# EAGLE board power mux-fpf1320 (EAGLE 6.5.0)
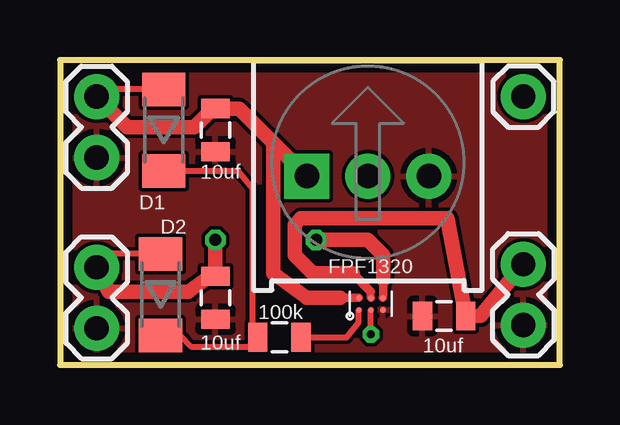
[diagram p0: board, top side]
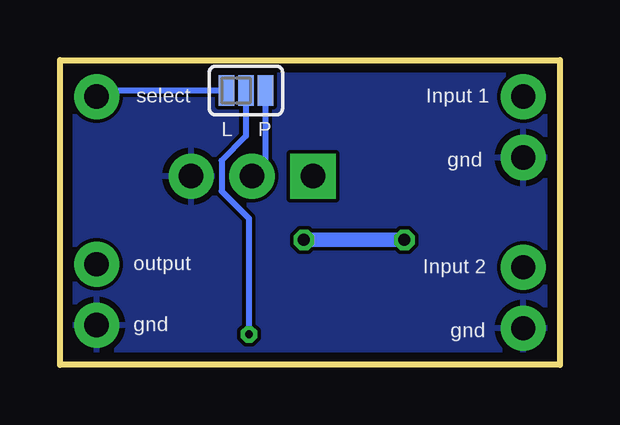
[diagram p1: board, bottom side, seen from below]

Size 20.83 x 12.7 mm. Coordinates in mm from the lower left corner, seen from the top.
Outline: 0,0 20.83,0 20.83,12.7 0,12.7 0,0
Copper layers (1*16): Top 0.0356mm / dielectric 1.5011mm / Bottom 0.0356mm
Design rules "LaenPCBOrder": minimum track width 6mil, minimum drill 13mil, track to track 6mil, track to pad 6mil, pad to pad 6mil, via to via 6mil, smd to smd 6mil, copper to edge 15mil, drill to drill 6mil, minimum pad ring 7mil, minimum via ring 7mil, stop-mask expansion 3mil, vias tented up to drill 0mil, thermal gap 10mil

## Footprints (pad centres in the part's own frame; a part is rotated, then mirrored left to right if it is on the bottom)
0805 = smd 0.8 x 1.2: 1 -0.9,0; 2 0.9,0
SOD80 = smd 1.4 x 1.8: 1 -1.7,0; 2 1.7,0
1X02 = drill 1.016 pad 1.88: 1 0,0; 2 2.54,0
1X01 = drill 1.016 pad 1.88: 1 0,0
3386U = drill 1.016 pad 1.88 square: 1 -2.54,-0.015 | drill 1.016 pad 1.88: 2 0,-0.015; 3 2.54,-0.015
SJ_3_PASTE1&2 = smd 0.635 x 1.27: 1 -0.813,0; 2 0,0; 3 0.813,0
6-UFBGA = smd 0.25 x 0.25: EN -0.25,0.5; GND -0.25,-0.5; SEL -0.25,0; VINA 0.25,0.5; VINB 0.25,-0.5; VOUT 0.25,0

## Placement (x,y rotation side)
C1  10uf  [0805]  6.48,9.78 270 top
C2  10uf  [0805]  6.48,2.79 270 top
C3  10uf  [0805]  16,2.03 180 top
D1  LL4148FSCT-ND  [SOD80]  4.32,9.78 90 top
D2  LL4148FSCT-ND  [SOD80]  4.19,2.92 90 top
JP1  M02PTH  [1X02]  1.52,8.64 90 top
JP2  M02PTH  [1X02]  1.52,1.52 90 top
JP3  M02PTH  [1X02]  19.3,1.65 90 top
JP4  M01PTH  [1X01]  19.3,11.18 0 top
R1  TRIMPOT-PTH-KNOB  [3386U]  12.83,7.87 0 top
R2  100k  [0805]  9.14,1.14 0 top
SJ2  [SJ_3_PASTE1&2]  13.08,11.43 0 bottom
U$3  FPF1320  [6-UFBGA]  12.95,2.54 90 top

## Library data of the parts
C1-C3 = SparkFun-Capacitors
D1 D2 = semicon-smd-ipc
JP1-JP4 = SparkFun-Connectors
R1 = SparkFun-Electromechanical
R2 SJ2 = SparkFun-Passives
U$3 = Richards

## Nets
GND: C1.2 C2.2 C3.2 JP1.1 JP2.1 JP3.1 R1.3 U$3.GND
N$1: D1.1 D2.1 R2.1
N$2: R2.2 U$3.EN
N$3: SJ2.2 U$3.SEL
SEL: R1.2 SJ2.3
SELJ: JP4.1 SJ2.1
VINA: C1.1 D1.2 JP1.2 R1.1 U$3.VINA
VINB: C2.1 D2.2 JP2.2 U$3.VINB
VOUT: C3.1 JP3.2 U$3.VOUT

## Tracks (layer width: path | path; a pad name or v marks a point on that pad's centre or on a via)
GND
  pour Bottom: 0,12.7 0,0 20.83,0 20.83,12.7
  pour Top: 0,0 20.83,0 20.83,12.7 0,12.7
N$1
  Top 0.254: D1.1 7.42,8.08 8,7.37 8,1.28 R2.1 7.86,0.76 5.46,0.76 5,1.22 D2.1
N$2
  Top 0.254: R2.2 11.94,1.14 12.45,1.78 U$3.EN
N$3  (via drill 0.33)
  Top 0.254: v12.95,1.27 U$3.SEL
  Bottom 0.254: SJ2.2 13.08,9.53 14.1,8.51 14.1,7.24 12.95,6.1 v12.95,1.27
SEL
  Bottom 0.254: SJ2.3 12.27,8.42 R1.2
SELJ
  Bottom 0.254: JP4.1 18.54,11.43 SJ2.1
VINA
  Top 0.254: D1.2 1.83,11.48 JP1.2
  Top 0.356: 11.68,2.79 U$3.VINA
  Top 0.61: JP1.2 2.79,9.91 5.59,9.91 6.36,10.68 C1.1 7.47,10.68 9.14,9.01 | 9.14,9.01 R1.1 | 9.14,9.01 8.89,9.14 8.89,3.81 10.29,2.79 11.68,2.79
VINB  (via drill 0.5)
  Top 0.254: D2.2 2.08,4.62 JP2.2
  Top 0.356: 13.46,3.56 13.46,2.92 U$3.VINB
  Top 0.61: JP2.2 2.03,3.05 5.33,3.05 6.23,3.69 C2.1 v6.48,5.21 | v10.67,5.21 12.83,5.21 13.46,4.57 13.46,3.56
  Bottom 0.61: v6.48,5.21 v10.67,5.21
VOUT
  Top 0.33: U$3.VOUT 12.95,3.05
  Top 0.356: 12.95,3.05 12.19,3.81
  Top 0.61: 12.19,3.81 10.54,3.81 9.78,4.57 9.78,5.84 10.03,6.1 16.14,6.1 C3.1 17.54,2.04 JP3.2

## Text on the board
tPlace: 10uf | D1 | D2 | FPF1320 | 100k | 10uf | 10uf
bPlace: Input 1 | select | P | L | gnd | Input 2 | output | gnd | gnd